# Altium PCB S3P.PcbDoc
Units mm, origin at the board's own origin, x right, y up, seen from the top; angles counter-clockwise.
Board outline 152.4 x 101.6 mm, 4 copper layers (F.Cu, In1.Cu, In2.Cu, B.Cu); 9 components, 75 nets, 83 pads, 0 vias.
Unrouted connection lines stored in the file: 21.
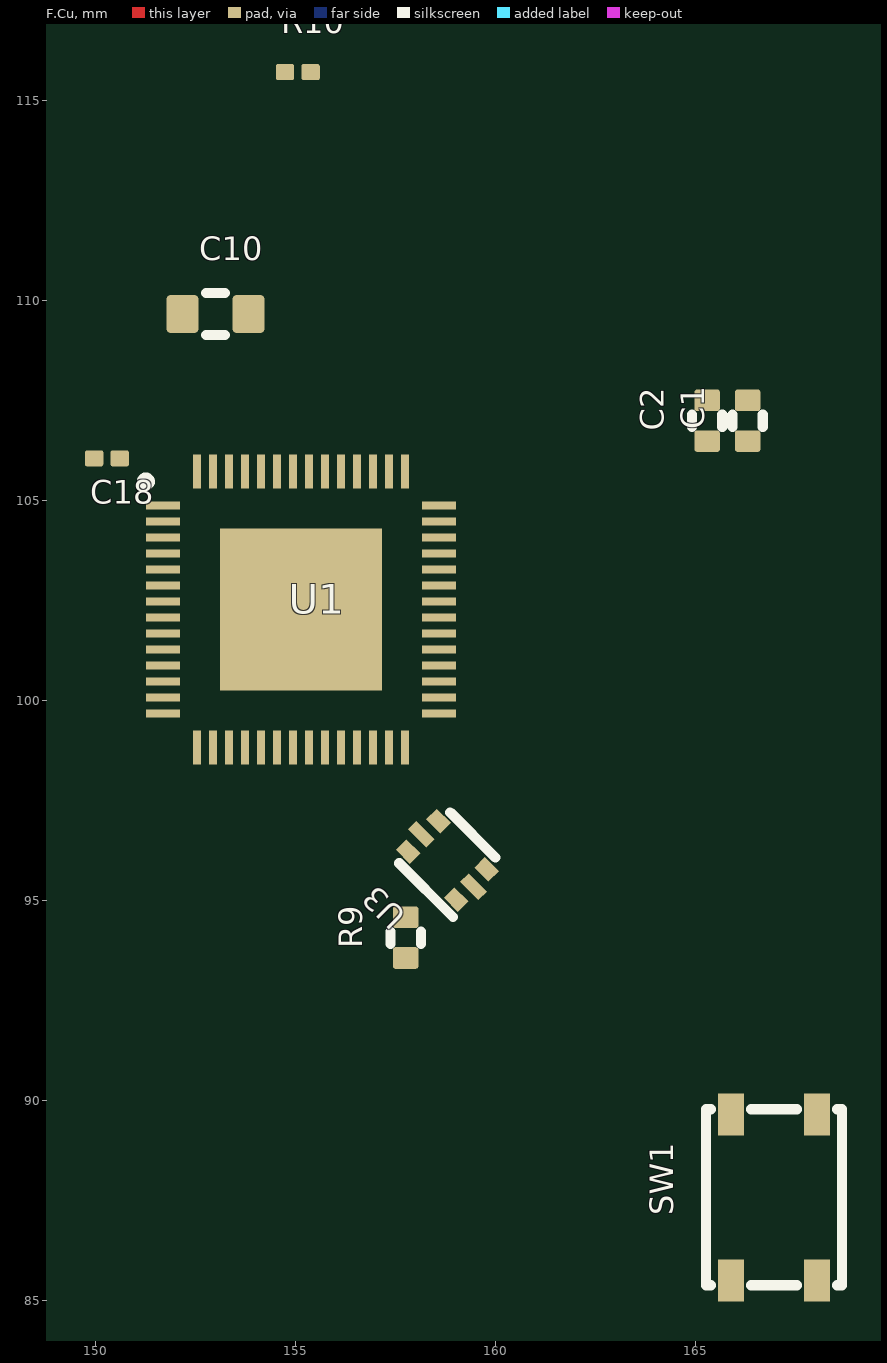
[diagram p0: F.Cu view]
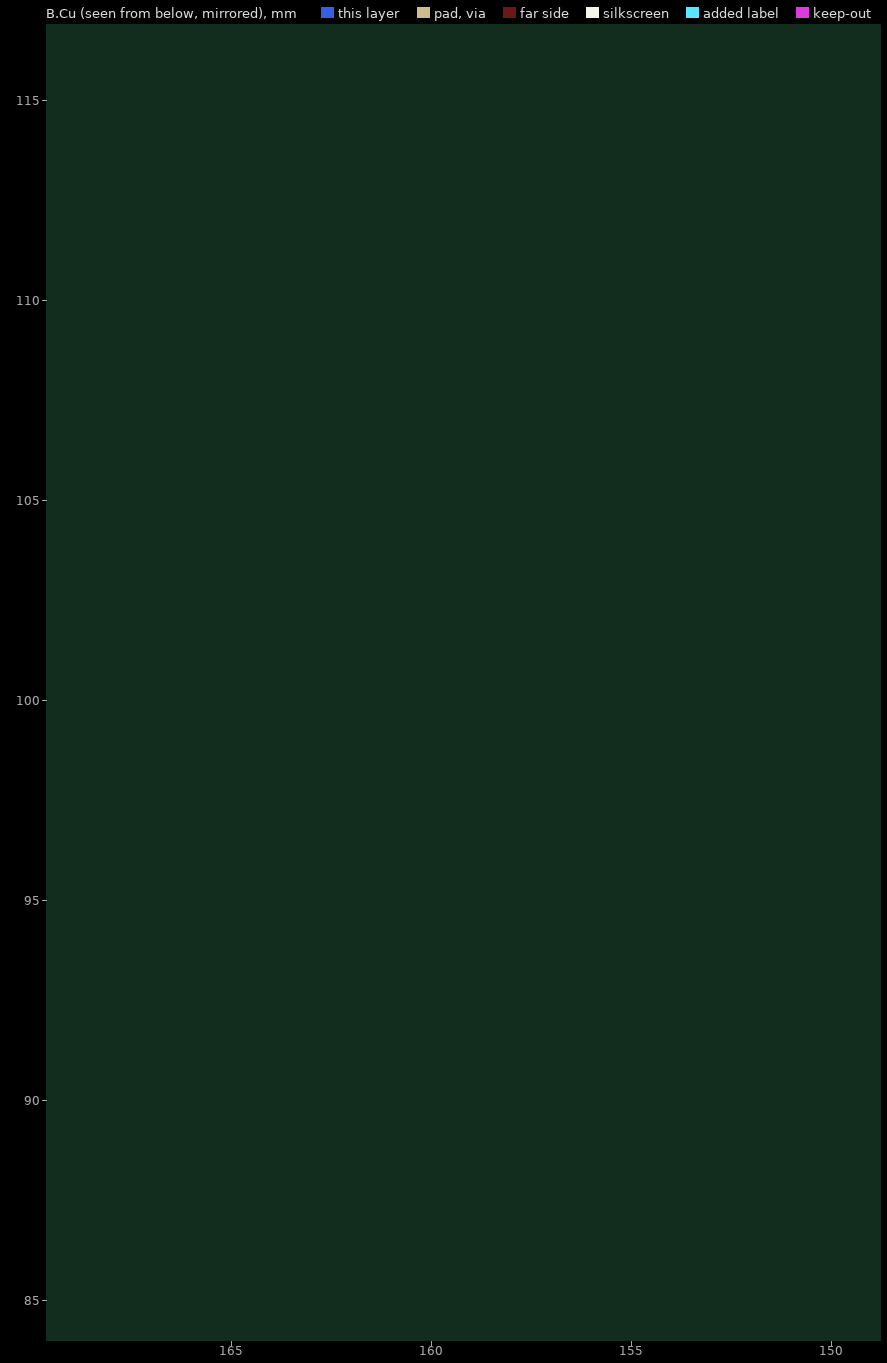
[diagram p1: B.Cu view, seen from below]

## Layer stack, top to bottom
F.Mask: solder mask 0.0102, Solder Resist, Dk 3.5
F.Cu: signal copper 0.0356
Dielectric 1: dielectric 0.32, FR-4, Dk 4.8
In1.Cu: signal copper 0.0356
Dielectric2: dielectric 0.32, FR-4, Dk 4.8
In2.Cu: signal copper 0.0356
Dielectric3: dielectric 0.32, FR-4, Dk 4.8
B.Cu: signal copper 0.0356
B.Mask: solder mask 0.0102, Solder Resist, Dk 3.5

## Board outline
25.4,25.4 177.8,25.4 177.8,127 25.4,127

## Design rules (kind name [scope] priority, off if disabled: settings)
RoutingVias [All] p1: holewidth=0.711 width=1.27 viastyle="Through Hole" minholewidth=0.711 minwidth=1.27 maxholewidth=0.711 maxwidth=1.27
SolderMaskExpansion [All] p1: expansion=0.102 istentingtop=FALSE
29 further rules are at their usual default settings.

## Classes and differential pairs
pad class "Pad Class Clearance 0.1": U1-1 U1-2 U1-3 U1-4 U1-5 U1-6 U1-7 U1-8 U1-9 U1-10 U1-11 U1-12 U1-13 U1-14 U1-15 U1-16 U1-17 U1-18 U1-19 U1-20 U1-21 U1-22 U1-23 U1-24 U1-25 U1-26 U1-27 U1-28 U1-29 U1-30 U1-31 U1-32 U1-33 U1-34 U1-35 U1-36 U1-37 U1-38 U1-39 U1-40 U1-41 U1-42 U1-43 U1-44 U1-45 U1-46 U1-47 U1-48 U1-49 U1-50 U1-51 U1-52 U1-53 U1-54 U1-55 U1-56 U1-57

## Components (designator, comment, footprint, x,y, rotation, side; value= is the part's Value field where it differs from the comment)
C1 "Comment" R_0402_1005Metric 166.298,107 r90 top value=0.1uF
C2 "Comment" R_0402_1005Metric 165.285,107 r90 top value=1uF
C10 "Comment" R_0603_1608Metric 152.995,109.667 r0 top value=10uF
C18 "Comment" R_0201_0603Metric 150.28,106.058 r180 top value=2.7pF
R9 "Comment" R_0402_1005Metric 157.75,94.078 r90 top value=5.1k
R10 "Comment" R_0201_0603Metric 155.052,115.715 r0 top value=0
SW1 "Comment" SW_SPST_PTS810 166.957,87.585 r90 top value=SW_SPST
U1 "Comment" QFN40P700X700X90-57N-D 155.129,102.278 r0 top value=ESP32-S3R8
U3 "Comment" SOT-666 158.791,96.007 r135 top value=USBLC6-2P6

## Footprints (in the part's own frame and the unit in brackets; to place one, negate y for a bottom-side part, rotate by r counter-clockwise, add the part's x,y. Pads: shape width x height; smd on the part's side, far side on the other; paste and mask are expansions set on the pad)
QFN40P700X700X90-57N-D [mm]
  rect 0.85x0.2 smd mask+0: 1(-3.45,2.6) 2(-3.45,2.2) 3(-3.45,1.8) 4(-3.45,1.4) 5(-3.45,1) 6(-3.45,0.6) 7(-3.45,0.2) 8(-3.45,-0.2) 9(-3.45,-0.6) 10(-3.45,-1) 11(-3.45,-1.4) 12(-3.45,-1.8) 13(-3.45,-2.2) 14(-3.45,-2.6) 29(3.45,-2.6) 30(3.45,-2.2) 31(3.45,-1.8) 32(3.45,-1.4) 33(3.45,-1) 34(3.45,-0.6) 35(3.45,-0.2) 36(3.45,0.2) 37(3.45,0.6) 38(3.45,1) 39(3.45,1.4) 40(3.45,1.8) 41(3.45,2.2) 42(3.45,2.6)
  rect 0.2x0.85 smd mask+0: 15(-2.6,-3.45) 16(-2.2,-3.45) 17(-1.8,-3.45) 18(-1.4,-3.45) 19(-1,-3.45) 20(-0.6,-3.45) 21(-0.2,-3.45) 22(0.2,-3.45) 23(0.6,-3.45) 24(1,-3.45) 25(1.4,-3.45) 26(1.8,-3.45) 27(2.2,-3.45) 28(2.6,-3.45) 43(2.6,3.45) 44(2.2,3.45) 45(1.8,3.45) 46(1.4,3.45) 47(1,3.45) 48(0.6,3.45) 49(0.2,3.45) 50(-0.2,3.45) 51(-0.6,3.45) 52(-1,3.45) 53(-1.4,3.45) 54(-1.8,3.45) 55(-2.2,3.45) 56(-2.6,3.45)
  rect 4.05x4.05 smd mask+0: 57(0,0)
  silkscreen extent -3.97,3.1 -3.78,3.3
R_0201_0603Metric [mm]
  rrect25% 0.46x0.4 smd paste-0.46 mask+0: 1(-0.32,0) 2(0.32,0)
  rrect25% 0.318x0.36 on Top Paste mask-0.36: Un1(-0.345,0) Un2(0.345,0)
R_0402_1005Metric [mm]
  rrect25% 0.54x0.64 smd mask+0: 1(-0.51,0) 2(0.51,0)
  silkscreen extent -0.15,-0.38 0.15,0.38
R_0603_1608Metric [mm]
  rrect25% 0.8x0.95 smd mask+0: 1(-0.825,0) 2(0.825,0)
  silkscreen extent -0.24,-0.52 0.24,0.52
SOT-666 [mm]
  rect 0.5x0.375 smd mask+0: 1(-0.85,0.537) 3(-0.85,-0.537) 4(0.85,-0.537) 6(0.85,0.537)
  rect 0.65x0.3 smd mask+0: 2(-0.925,0) 5(0.925,0)
  silkscreen extent -1.1,-0.9 0.8,0.9
SW_SPST_PTS810 [mm]
  rect 1.05x0.65 smd mask+0: 1(-2.075,1.075) 1(2.075,1.075) 2(-2.075,-1.075) 2(2.075,-1.075)
  silkscreen extent -2.2,-1.7 2.2,1.7

## Part data
C1 C2 R9: library part R_0402_1005Metric, "Resistor SMD 0402 (1005 Metric), square (rectangular) end terminal, IPC_7351 nominal, (Body size source: IPC-SM-782 page 72, https://www.pcb-3d.com/wordpress/wp-content/uploads/ipc-sm-782a_amendment_1_and_2.pdf), generated with kicad-footprint-generator"
  C1 C2: Description="Unpolarized capacitor"
  R9: Description=Resistor
C10: library part R_0603_1608Metric, "Resistor SMD 0603 (1608 Metric), square (rectangular) end terminal, IPC_7351 nominal, (Body size source: IPC-SM-782 page 72, https://www.pcb-3d.com/wordpress/wp-content/uploads/ipc-sm-782a_amendment_1_and_2.pdf), generated with kicad-footprint-generator", Description="Unpolarized capacitor"
C18 R10: library part R_0201_0603Metric, "Resistor SMD 0201 (0603 Metric), square (rectangular) end terminal, IPC_7351 nominal, (Body size source: https://www.vishay.com/docs/20052/crcw0201e3.pdf), generated with kicad-footprint-generator"
  C18: Description="Unpolarized capacitor"
  R10: Description=Resistor
SW1: library part SW_SPST_PTS810, "C&K Components, PTS 810 Series, Microminiature SMT Top Actuated, http://www.ckswitches.com/media/1476/pts810.pdf", Description="Single Pole Single Throw (SPST) switch"
U1: library part QFN40P700X700X90-57N-D, "QFN56 (7×7 mm) Package", Package=None, Description="\nIC RF TxRx + MCU Bluetooth, WiFi 802.11b/g/n, Bluetooth v5.0 2.412GHz ~ 2.484GHz 56-VFQFN Exposed Pad\n", Availability="In Stock", Check_prices=https://www.snapeda.com/parts/ESP32-S3R8/Espressif+Systems/view-part/?ref=eda, MF="Espressif Systems", MP=ESP32-S3R8, Price=None, Purchase-URL="https://www.snapeda.com/api/url_track_click_mouser/?unipart_id=9754695&manufacturer=Espressif Systems&part_name=ESP32-S3R8&search_term=esp32-s3r8", SnapEDA_Link=https://www.snapeda.com/parts/ESP32-S3R8/Espressif+Systems/view-part/?ref=snap
U3: library part SOT-666, "SOT666", Description="Very low capacitance ESD protection diode, 2 data-line, SOT-666"

## Nets (pads, with @x,y where several pads share a name; then routed paths per layer and width w, separated by ;. In a path a pad name is that pad's centre, name@x,y a point inside that pad or via, vN(x,y) a via of type N, cw(c..) or ccw(c..) an arc to the next point about the centre after c; other vN are vias at no path point)
1: U1.6
2: U1.7
3: U1.8
4: U1.9
5: U1.10
6: U1.11
7: U1.12
8: U1.13
9: U1.14
10: U1.15
11: U1.16
12: U1.17
13: U1.18
14: U1.19
15: U1.21
16: U1.22
17: U1.23
18: U1.24
21: U1.27
45: U1.51
46: U1.52
47: U1.37
48: U1.36
+3V3: C10.1 U1.20 U1.46 U1.55 U1.56
BOOT: SW1.1 U1.5
D+: U1.26 U3.4
D-: U1.25 U3.6
D_N: U3.1
D_P: U3.3
GND: C1.2 C2.2 C10.2 C18.2 R9.2 SW1.2 U1.57 U3.2
LNA_IN: C18.1 U1.1
Net-(ANT1-FEED{slash}GND): R10.2
Net-(C3-Pad1): 
Net-(C19-Pad1): R10.1
Net-(D4-A): 
Net-(D5-PadC): 
Net-(J1-CC1): R9.1
Net-(J1-CC2): 
Net-(Q1-B): 
Net-(U1-SPICLK): U1.33
Net-(U1-SPID): U1.35
Net-(U1-SPIHD): U1.30
Net-(U1-SPIQ): U1.34
Net-(U1-SPIWP): U1.31
PIEZO: U1.43
RESET: U1.4
SPICLK: 
SPICS0: U1.32
SPICS1: U1.28
SPID: 
SPIHD: 
SPIQ: 
SPIWP: 
U3V3: 
unconnected-(J1-SBU1-PadA8): 
unconnected-(J1-SBU2-PadB8): 
unconnected-(J1-SHIELD-PadS1): 
unconnected-(U1-GPIO33-Pad38): U1.38
unconnected-(U1-GPIO34-Pad39): U1.39
unconnected-(U1-GPIO35-Pad40): U1.40
unconnected-(U1-GPIO36-Pad41): U1.41
unconnected-(U1-GPIO37-Pad42): U1.42
unconnected-(U1-MTCK-Pad44): U1.44
unconnected-(U1-MTDI-Pad47): U1.47
unconnected-(U1-MTDO-Pad45): U1.45
unconnected-(U1-MTMS-Pad48): U1.48
unconnected-(U1-U0RXD-Pad50): U1.50
unconnected-(U1-U0TXD-Pad49): U1.49
unconnected-(U2-DOUT-Pad3): 
VBUS: U3.5
VDD3P3: U1.2 U1.3
VDD_SPI: C1.1 C2.1 U1.29
VIN: 
XTAL_N: U1.53
XTAL_P: U1.54
pads on no net: C18.Un1 C18.Un2 R10.Un1 R10.Un2